# Altium PCB ESP32 with USBCPCB.PcbDoc (part 3 of 3)
Units mil, origin at the board's own origin, x right, y up, seen from the top; angles counter-clockwise.
Board outline 2800 x 1000 mil, 4 copper layers (L1, L2, L3, L4), stack 61.583 mil thick; 64 components, 73 nets, 299 pads, 159 vias.
Unrouted connection lines stored in the file: 2.
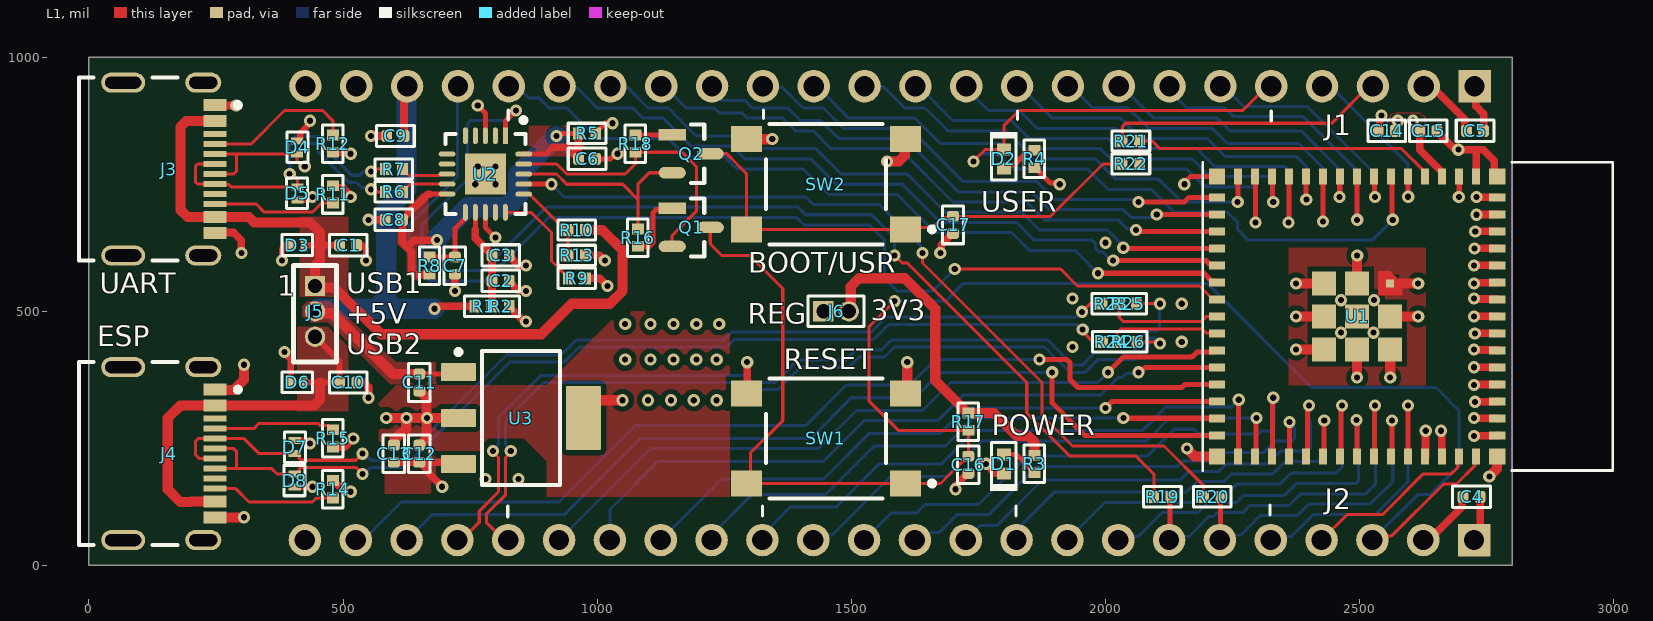
[diagram p0: L1 view]

## Via types
v1: diameter 24, hole 12, L1 to L4, tented both sides, 159 vias

## Nets (pads, with @x,y where several pads share a name; then routed paths per layer and width w, separated by ;. In a path a pad name is that pad's centre, name@x,y a point inside that pad or via, vN(x,y) a via of type N, cw(c..) or ccw(c..) an arc to the next point about the centre after c; other vN are vias at no path point) (continued)
GND: (continued)
  L1 w15: J3.B1A12 248.7,655 285,655 300,640 v1(300,615) ; J3.A1B12 248.54,905 v1(290,905) ; R14.1 481.18,167.01 501.47,146.72 513.28,146.72 v1(515,145) ; R15.1 502.99,232.99 v1(520,250) ; C10.1 541.21,360 550,351.21 v1(550,330) ; v1(550,680) C8.1 ; v1(555,845) C9.1 ; v1(720,540) C7.1 ; C2.1 826.93,558.82 844.03,541.72 858.28,541.72 v1(860,540) ; C3.1 826.93,608.82 845.75,590 v1(860,590) ; R9.1 1005,565 v1(1020,550) ; R13.2 1005,610 v1(1015,600) ; SW1.4 1295,340.08 v1(1295,400) ; v1(1675,615) 1676.72,616.72 1676.72,630.97 1698.82,653.07 C17.1 ; v1(1705,150) 1705,157.32 1728.82,181.14 C16.1 ; v1(1765,200) 1765,198.9 1782.6,181.3 D1.1 ; C14.1 2539.27,858.13 2539.27,878.77 2543.07,882.56 v1(2543.07,885) ; J2.2 2636,50 2701.56,115.56 2701.56,133.48 C4.1 ; U1.42 2629.45,214.96 2629.45,264.45 v1(2630,265) ; C15.1 2655.06,851.87 2655.06,850.69 2686.03,819.72 2692.28,819.72 v1(2694,818) 2727,818 ; v1(2660,265) 2661.18,263.82 2661.18,215.59 U1.43 ; v1(2695,725) v1@2695.83,725.83 ; v1(2725,255) 2725.37,255.37 2770.26,255.37 U1.46 ; v1(2725,290) 2769.84,290 U1.47 ; v1(2725,390) U1.50@2770.24,390 ; v1(2725,425) 2725.96,424.04 2769.67,424.04 U1.51 ; v1(2725,490) U1.53 ; v1(2725,525) 2725.77,524.23 2769.86,524.23 U1.54 ; v1(2725,555) 2725.96,555.96 2769.67,555.96 U1.55 ; J1.1@2725,950 2728,947 2728,904 2743.86,888.14 C5.1 ; v1@2725.39,590.39 U1.56 ; v1(2726.14,623.86) U1.57 ; v1@2726.18,356.18 U1.49@2774.41,356.18 ; v1(2726.54,456.54) U1.52 ; v1(2727.01,322.01) 2769.96,322.01 U1.48 ; v1(2727.32,657.32) U1.58 ; U1.1 2729.29,815.71 2727,818 ; v1(2730,690) 2730.39,690.39 2770.24,690.39 U1.59 ; v1(2730,725) 2730.37,724.63 2770.26,724.63 U1.60 ; U1.65@2770,213.78 U1.65 ; U1.62 2765,771.22 2765,796 2743,818 2727,818
  L1 w20: J4.B1A12 304.09,94.09 v1(305,95) ; J4.A1B12 248.7,345 285,345 305,365 v1(305,395) ; v1(585,290) v1(625,290) ; C13.1 601.18,236.93 601.81,237.56 601.81,248.27 613.53,259.98 615.41,259.98 624.23,268.81 624.23,289.23 v1(625,290) ; C12.1 651.18,236.93 664.23,249.98 664.23,289.23 v1(665,290) ; C11.1 651.18,343.07 664.23,330.02 664.23,290.77 v1(665,290) ; U3.2 v1(665,290) ; U3.4 973.03,300.55 997.48,325 v1(1050,325) ; SW2.4 1343.58,838.58 v1@1345,840 ; v1(1570,795) 1593.28,795 1605,806.72 1605,837.09 SW2.3 ; SW1.3 1610,342.09 v1(1610,400) ; v1(2160,230) 2175.59,214.41 U1.64 ; v1(2375,555) v1(2375,555) U1.71 ; v1@2375.04,425.04 U1.73 ; v1(2375,490.04) U1.72 ; v1(2495,369.96) U1.70 ; U1.69 v1@2495.04,610 ; v1(2559.96,369.96) U1.68 ; U1.67 v1@2615.04,490 ; U1.66 v1@2615.04,554.96 ; v1(2755,175) 2770,190 U1.65@2770,213.78 ; v1(625,290) v1(665,290)
  other v1: 780,170 845,170 1100,325 1145,325 1190,325 1235,325 2725,355 1055,405 1105,405 1150,405 1195,405 1235,405 2375,425.08 1935,430 2150,440 2463,458 2527,458 1055,475 1105,475 1150,475 1195,475 1240,475 2615.08,489.96 2150,515 2463,522 2528,522 1935,525 2615.08,554.92 2725,590 2495.08,610.04 2000,635 760,750 800,750 765,785 800,785 1344.29,839.29 435,875
GPIO0: R21.2 R22.2 U1.4 | length 640.3
  L1 w6: R22.2 R21.2 2091.75,835 2106.75,820 2582.36,820 2628.9,773.46 U1.4
GPIO1: J1.4 U1.5 | length 341.2
  L1 w10: v1(2595.43,725.43) U1.5
  L4 w6: J1.4@2425,950 2435,950 2595.43,789.57 v1(2595.43,725.43)
GPIO2: D2.1 J1.5 U1.6 | length 1689.7
  L1 w6: v1(1740,795) 1763.7,818.7 D2.1 1800,865 1830,895 2270,895 J1.5@2325,950
  L1 w10: U1.6 2563.48,764.07 2563.48,681.52 v1(2565,680)
  L4 w6: v1(1740,795) 1755,810 1786.72,810 1816.72,780 1965,780 2005,740 2090,740 2135,695 2240,695 2260,675 2260,660.86 2280.86,640 2525,640 v1(2565,680)
GPIO3: J1.6 U1.7 | length 465.8
  L1 w10: U1.7 2529.25,764.84 2529.25,725.75 v1(2530,725)
  L4 w6: J1.6@2225,950 2272,903 2397,903 2530,770 v1(2530,725)
GPIO4: J1.7 U1.8 | length 632.8
  L1 w10: v1(2495.04,680.04) U1.8
  L4 w6: J1.7@2125,950 2125,935.39 2147.94,912.44 2147.94,912.06 2160,900 2235,900 2252,883 2388.72,883 2495.04,776.68 v1(2495.04,680.04)
GPIO5: J1.8 U1.9 | length 602.4
  L1 w10: v1(2460,725) 2460.79,725.79 2460.79,764.8 U1.9
  L4 w6: J1.8@2025,950 2095,880 2135,880 2135.86,880.86 2144.14,880.86 2145,880 2220,880 2245,855 2385,855 2460,780 v1(2460,725)
GPIO6: J1.9 U1.10 | length 767
  L1 w10: v1(2428.11,676.97) U1.10
  L4 w6: J1.9@1925,950 1975,900 2033.56,900 2034.42,900.86 2042.71,900.86 2056.06,887.5 2057.5,887.5 2085,860 2210,860 2240,830 2380,830 2428.11,781.89 v1(2428.11,676.97)
GPIO7: J1.10 U1.11 | length 742.4
  L1 w10: v1@2394.25,720.75 U1.11@2394.25,759.84
  L4 w6: J1.10@1825,950 1895,880 2030,880 2070,840 2200,840 2235,805 2375,805 2395,785 v1(2395,720)
GPIO8: J1.11 U1.12 | length 907.1
  L1 w10: v1(2360.04,675.04) 2361.18,676.18 U1.12
  L4 w6: J1.11@1725,950 1725,939.53 1769.53,895 1830,895 1865,860 2020,860 2059.11,820.89 2064.11,820.89 2065,820 2180,820 2215,785 2354.18,785 2360.04,779.14 v1(2360.04,675.04)
GPIO9: J1.12 U1.13 | length 879.7
  L1 w10: U1.13 2328.86,764.45 2328.86,716.14 v1(2330,715)
  L4 w6: J1.12@1625,950 1700,875 1815,875 1850,840 2005,840 2045,800 2170,800 2204.11,765.89 2209.11,765.89 2210,765 2324.14,765 2330,759.14 v1(2330,715)
GPIO10: J1.13 U1.14 | length 1007
  L1 w10: v1(2295.04,675.04) U1.14@2295.04,760.59
  L4 w6: J1.13@1525,950 1533.23,941.77 1563.23,941.77 1605,900 1645,900 1690,855 1805,855 1840,820 1990,820 2030,780 2160,780 2193.23,746.77 2198.23,746.77 2200,745 2289.18,745 2295.04,739.14 v1(2295.04,675.04)
GPIO11: J1.14 U1.15 | length 983.3
  L1 w10: v1(2260,715) 2260.79,715.79 U1.15
  L4 w6: J1.14@1425,950 1495,880 1625,880 1675,830 1795,830 1825,800 1980,800 2020,760 2105,760 2150,715 v1(2260,715)
GPIO12: J1.15 U1.16 | length 995.6
  L1 w10: v1(2065,715) 2155,715 2164.25,724.25 U1.16
  L4 w6: J1.15@1325,950 1335,940 1365,940 1405,900 1445,900 1485,860 1615,860 1720,755 1865,755 1900,720 2052.14,720 2054.46,717.68 2062.32,717.68 v1(2065,715)
GPIO13: J1.16 U1.17 | length 1113.5
  L1 w10: v1(2100.79,690.79) U1.17
  L4 w6: J1.16@1225,950 1225,938.18 1248.18,915 1290,915 1305,900 1375,900 1400,875 1440,875 1475,840 1605,840 1710,735 1855,735 1890,700 2035,700 2050,685 2091.21,685 2097,690.79 v1(2100.79,690.79)
GPIO14: J1.17 U1.18 | length 1215.7
  L1 w10: v1(2060,660) 2062.68,657.32 U1.18
  L4 w6: J1.17@1125,950 1175,900 1230,900 1240,890 1285,890 1295,880 1365,880 1390,855 1425,855 1460,820 1595,820 1700,715 1845,715 1880,680 2025,680 2042.32,662.68 2057.32,662.68 v1(2060,660)
GPIO15: J1.18 U1.19 | length 1331.8
  L1 w10: v1(2035,625) 2036.14,623.86 U1.19
  L4 w6: J1.18@1025,950 1035.33,939.67 1060.33,939.67 1100,900 1140,900 1195,845 1275,845 1300,820 1430,820 1480,770 1610,770 1685,695 1835,695 1870,660 2003.79,660 2015,648.79 2035,628.78 v1(2035,625)
GPIO16: J1.19 U1.20 | length 1449.5
  L1 w10: v1(2015,600) 2197.84,600 2204.58,593.27 2216.57,593.27 U1.20
  L4 w6: J1.19@925,950 935.33,939.67 960.33,939.67 1000,900 1070,900 1090,880 1130,880 1185,825 1265,825 1290,800 1420,800 1470,750 1600,750 1675,675 1825,675 1860,640 1974.14,640 1980,634.14 1980,623.79 1986.97,616.82 1994.39,616.82 2011.21,600 v1(2015,600)
GPIO17: J1.20 U1.21 | length 1557.3
  L1 w10: v1(1985,575) 2193.5,575 2208.7,559.8 2216.57,559.8 U1.21
  L4 w6: J1.20@825,950 835,950 865,920 885,920 905,900 940,900 1000,840 1140,840 1175,805 1250,805 1275,780 1405,780 1455,730 1590,730 1665,655 1815,655 1850,620 1940,620 v1(1985,575)
GPIO18: J1.21 U1.22 | length 2193.9
  L1 w6: v1(1703.33,583.33) 1911.67,583.33 1945,550 2185.04,550 2211.57,523.46 U1.22
  L4 w6: J1.21@725,950 725,765 630,670 630,600 670,560 780,560 905,685 1391.72,685 1406.72,670 1535,670 1565,640 1565,565 1590,540 1660,540 v1(1703.33,583.33)
GPIO21: J2.19 U1.25 | length 1449
  L1 w10: v1(2005,380) 2035,410 2170,410 2180.2,420.2 2216.57,420.2 U1.25
  L4 w6: J2.19 1105,230 1435,230 1510,305 1640,305 1695,360 1985,360 v1(2005,380)
GPIO26: J2.18 U1.26 | length 1370.3
  L1 w10: v1(2065,380) 2068.79,380 2078.39,389.61 U1.26
  L4 w6: J2.18 1025,110 1120,205 1445,205 1525,285 1670,285 1720.13,335.13 1990.13,335.13 2025,370 2033,370 2040.32,377.32 2062.32,377.32 v1(2065,380)
GPIO33: J2.17 U1.28 | length 1207.4
  L1 w10: v1(2000,310) 2000.18,310 2012.86,322.68 U1.28
  L4 w6: J2.17 1245,170 1445,170 1535,260 1675,260 1725,310 v1(2000,310)
GPIO34: J2.16 U1.29 | length 1100
  L1 w10: v1(2035,290) 2035.39,289.61 2219.06,289.61 U1.29
  L4 w6: J2.16 1225,60 1305,140 1450,140 1545,235 1685,235 1740,290 v1(2035,290)
GPIO35: J2.15 U1.31 | length 1164.6
  L1 w10: U1.31@2259.96,219.41 2261.39,220.84 2261.39,325.39 v1(2262,326)
  L4 w6: J2.15 1325,60 1380,115 1470,115 1555,200 1678,200 1743,265 1745,265 1746,266 2073,266 2119,312 2248,312 v1(2262,326)
GPIO36: J2.14 U1.32 | length 1048.1
  L1 w10: U1.32 2295.63,215.78 2295.63,288.63 v1(2297,290)
  L4 w6: J2.14 1434.73,59.73 1461.73,59.73 1577,175 1687,175 1757,245 2081,245 2126,290 v1(2297,290)
GPIO37: J2.13 U1.33 | length 1081.6
  L1 w10: U1.33 2328.86,215.55 2328.86,328.86 v1(2330,330)
  L4 w6: J2.13 1578,103 1628,103 1645,120 1707.6,120 ; 1707,120 1750,120 1845,215 2082,215 2135,268 2174,268 2183,259 2301.2,259 2307.2,265 2325.14,265 2331,270.86 2331,329 v1(2330,330)
GPIO38: J2.12 U1.34 | length 927.8
  L1 w10: U1.34@2360.75,220.16 2361.59,221 2361.59,281.59 v1(2362,282)
  L4 w6: J2.12 1639.61,50 1654.61,65 1673,65 1708,100 1770,100 1865,195 2142,195 2153,206 2214,206 2230,222 2311,222 2334,245 2366.14,245 2372,250.86 2372,269.14 2362,279.14 v1(2362,282)
GPIO39: J2.11 U1.35 | length 935.9
  L1 w10: U1.35@2394.82,219.55 2397.32,222.05 2397.32,312.32 v1(2400,315)
  L4 w6: J2.11 1725.18,50 1754.18,79 1787,79 1876,168 2147,168 2164,185 2223,185 2238,200 2319,200 2344,225 2397.14,225 2403,230.86 2403,283 2400,286 v1(2400,315)
GPIO40: J2.10 U1.36 | length 831.3
  L1 w10: U1.36 2429.56,215.85 2429.56,284.56 v1(2430.28,285.28)
  L4 w6: J2.10 1835.33,60.33 1835.33,80.33 1900,145 2160,145 2180,165 2233,165 2248,180 2329,180 2353.16,204.16 2425.14,204.16 2431,210.02 2431,284.56 v1(2430.28,285.28)
GPIO41: J2.9 U1.37 | length 816
  L1 w10: U1.37@2461.79,221.66 2463.29,223.16 2463.29,313.29 v1(2465,315)
  L4 w6: J2.9 1999,124 2172,124 2192,144 2242,144 2258,160 2343,160 2365,182 2454.1,182 2465,192.9 v1(2465,315)
GPIO42: J2.8 U1.38 | length 708.8
  L1 w10: v1(2494,286) 2494.52,285.48 2494.52,221.39 U1.38@2495.75,220.16
  L4 w6: J2.8 2032.23,57.23 2064.23,57.23 2111,104 2181,104 2201,124 2257,124 2271,138 2352,138 2375,161 2492.14,161 2498,166.86 2498,273.14 2496.68,274.46 2496.68,283.32 v1(2494,286)
GPIO45: J2.5 U1.41 | length 563.1
  L1 w10: v1(2595,315) 2595.22,314.78 U1.41@2595.22,219.67
  L4 w6: J2.5 2331.73,56.73 2364.73,56.73 2408,100 2530,100 2595,165 v1(2595,315)
GPIO46: J2.4 U1.44 | length 349.8
  L1 w6: J2.4 2475,100 2545,100 2625.28,180.28 2680.28,180.28 2692.95,192.95 2692.95,211.54 U1.44
GPIO47: J2.23 U1.27 | length 1886.3
  L1 w10: v1(1870,405) 1924.14,405 1930,399.14 1930,365.86 1945.86,350 2150,350 2156.14,356.14 U1.27
  L4 w6: J2.23 539.61,50 555.35,65.73 555.73,65.73 615,125 925,125 1075,275 1410,275 1490,355 1615,355 1665,405 v1(1870,405)
GPIO48: J2.22 U1.30 | length 1817.8
  L1 w10: v1(1895,380) 1895,320 1959.25,255.75 2125.75,255.75 U1.30
  L4 w6: J2.22 665,90 674.84,99.84 709.84,99.84 710,100 935,100 1085,250 1420,250 1500,330 1625,330 1675,380 v1(1895,380)
NetD1_2: D1.2 R3.1 | length 75.5
  L1 w10: D1.2 1824.29,218.7 1853.19,189.8 1853.19,188.62 1858.82,182.99 R3.1
NetD2_2: D2.2 R4.1 | length 74.8
  L1 w10: D2.2 1806.72,788.02 1820.09,788.02 1843.45,811.38 1854.37,811.38 R4.1
NetJ3_A5: J3.A5 R12.2 | length 295.9
  L1 w6: J3.A5 300,829.13 319.13,829.13 385,895 460,895 480,875 R12.2
NetJ3_B5: J3.B5 R11.2 | length 246.5
  L1 w6: J3.B5 328.98,711.02 345,695 440,695 457.99,712.99 R11.2
NetJ4_A5: J4.A5 R15.2 | length 241.9
  L1 w6: J4.A5 324.29,269.29 334.67,279.67 450.33,279.67 455,275 472.01,275 R15.2
NetJ4_B5: J4.B5 R14.2 | length 246.5
  L1 w6: J4.B5 288.82,151.18 315,125 440,125 447.99,132.99 R14.2
NetQ1_1: Q1.1 R16.1 | length 133
  L1 w10: R16.1 1102.99,627.99 1110,635 1110,694.14 1115.86,700 1145.18,700 Q1.1
NetQ2_1: Q2.1 R18.2 | length 72.7
  L1 w10: R18.2 1075.2,847.2 1147.38,847.2 Q2.1
NetR9_2: R9.2 U2.15 | length 210.7
  L1 w6: U2.15 870.41,694.59 910,655 910,599.17 942.99,566.18 R9.2
RTS_FTDI: Q1.2 R18.1 U2.19 | length 567.3
  L1 w6: U2.19 920.32,789.68 940,770 1055,770 1075,790 R18.1 1167.01,812.99 1195,785 1195,696.78 1147.58,649.36 Q1.2@1147.58,627.96
RXD_FTDI: R19.2 U2.1 | length 2285.5
  L1 w6: v1(1585,610) 1600,595 1610,595 1845,360 1845,300 1930,215 2060,215 2095,180 R19.2
  L1 w10: U2.1 819.37,874.37 v1(840,895)
  L4 w6: v1(840,895) 820,875 750.86,875 745,869.14 745,760 655,670 655,605 680,580 775,580 900,705 1395,705 1410,690 1540,690 1585,645 v1(1585,610)
TXD_FTDI: R20.2 U2.17 | length 1661
  L1 w6: v1(1640,615) 1640,595 1875,360 1875,295 1935,235 2115,235 2192.99,157.01 R20.2
  L1 w10: U2.17 855.57,750.16 909.84,750.16 v1(910,750)
  L4 w6: v1(910,750) 935,725 1410,725 1425,710 1555,710 1637.32,627.68 1637.32,617.68 v1(1640,615)
U0RXD: J2.6 R20.1 U1.40 | length 660
  L1 w10: J2.6 2226,51 2226,134 R20.1 ; U1.40@2561.48,220.89 2563.48,222.89 v1(2563.48,285.48)
  L4 w6: J2.6 2235,60 2266,60 2304,98 2377,98 2400,121 2521,121 2565,165 2565,283.97 v1(2563.48,285.48)
U0TXD: J2.7 R19.1 U1.39 | length 789.5
  L1 w10: J2.7 2127.01,52.01 2127.01,132.99 R19.1 ; U1.39@2529.75,219.62 2529.25,220.12 2529.25,314.25 v1(2530,315)
  L4 w6: J2.7 2132.23,57.23 2164.23,57.23 2203.34,96.34 2212.34,96.34 2220,104 2270,104 2284,118 2361,118 2384,141 2512,141 2531,160 2531,314 v1(2530,315)
VBUS_SENSE: R10.2 R13.1 U2.16 | length 167.5
  L1 w6: U2.16 866.72,730.63 930.54,666.81 937.36,666.81 942.99,661.18 R10.2 R13.1
pads on no net: J1.24 J3.A8 J3.B8 J4.A8 J4.B8 U2.2 U2.4 U2.5 U2.6 U2.7 U2.14

## Polygon pours and split planes (outlines as drawn)
+3V3_FTDI on L1 "+3V3_FTDI_L01_P003" (solid, remove dead copper, pour order 3): 683,561 639,561 625,575 625,615 607,633 607,670 605,672 605,692 615,692 656,733 668,721 668,659 674,653 691,653 700,644 700,632 696,632 690,626 689,627 645,627 645,586 646,585 681,585 683,583 683,562
+3.3V on L1 "+3.3V_L01_P000" (solid, remove dead copper, pour order 0): 2554.5,834 2625.5,834 2629.5,838 2628.5,839 2628.5,881 2619.5,890 2570.5,890 2561.5,887 2559.5,881 2554.5,873
+5V_VBUS1 on L1 "+5V_VBUS1_L01_P007" (solid, remove dead copper, pour order 7): 416,529 510,529 510,686 415,686 415,530
+5V_VBUS2 on L1 "+5V_VBUS2_L01_P008" (solid, remove dead copper, pour order 8): 408,469 409,470 470,470 510,430 510,303 410,303 410,470
GND on L1 "GND_L01_P011" (solid, remove dead copper, pour order 11): 1260.32,138 1260.32,165.54 1260.32,500.54 1045.32,500.54 899.78,355 604.78,355 570.32,320.54 570.32,240.54 585.32,225.54 770.32,225.54 770.32,235.54 785.32,250.54 855.32,250.54 900.32,205.54 900.32,135.54 1250.32,135.54 1260.32,135.54
+3.3V_REG on L1 "+3.3V_REG_L01_P005" (solid, remove dead copper, pour order 5): 764,220 764,141 582,141 582,218 581,219 582,220 763,220
+5V on L1 "+5V_L01_P006" (solid, pour order 6): 764,401 763,400 605,400 475,520 430,520 420,510 420,490 436.5,479 471,479 593,357 765,357 765,400
GND on L1 "GND_L01_P009" (solid, pour order 9): 2360,625 2630,625 2630,355 2360,355
+3V3_FTDI on L1 "+3V3_FTDI_L01_P002" (solid, pour order 2): 975,865 975,785 950,785 950,795 940,805 865,805 865,865
GND on L2 "GND_L02_P018" (solid, remove dead copper, pour order 18): 2787,12 2787,985 7,985 7,12
+3.3V on L2 "+3.3V_L02_P017" (solid, pour order 17): 2764,16 2767,19 2767,982 1007,982 983,958 983,853 986,853 999,840 1105,840 1276,669 1474,669 1474,493 1488,479 1506,479 1517,497 1517,636 1546,665 1931,665 1979,713 2039,713 2039,733 2080,774 2082,772 2579,772 2664,669 2663,668 2663,302 2633,302 2607,276 2607,180 2490,180 2390,80 2390,17 2762,17 2764,19 2766,19
+3.3V_REG on L2 "+3.3V_REG_L02_P013" (solid, pour order 13): 567.5,221.02 559,203.97 559,130.02 765,130.02 765,221.02
GND on L3 (split plane): 2779.9,20.1 20.1,20.1 20.1,979.9 2779.9,979.9

## Silkscreen, mask and mechanical layers (free items; w line width, h text height)
Top Overlay:
  lines w6: 824,95 824,117 ; 825,876 825,896 ; 1325,97 1325,117 ; 1327,879 1327,896 ; 1824,97 1824,117 ; 1827,877 1827,894 ; 2324,99 2324,119 ; 2326,874 2326,894
  text "J1" at 2431,846 h40
  text "USER" at 1756,696 h40
  text "BOOT/USR" at 1296.72,576 h40
  text "UART" at 21,536 h40
  text "USB1" at 506,536 h40
  text "3V3" at 1538,482 h40
  text "+5V" at 506,476 h40
  text "REG" at 1296,476 h40
  text "ESP" at 16,431 h40
  text "USB2" at 506,416 h40
  text "RESET" at 1366.7,386 h40
  text "POWER" at 1776,256 h40
  text "J2" at 2431,111 h40
Bottom Overlay:
  text "GND" at 549,869 h40 r90
  text "5V" at 644,869 h40 r90
  text "I018" at 744,869 h40 r90
  text "I017" at 844,869 h40 r90
  text "I016" at 944,869 h40 r90
  text "I015" at 1044,869 h40 r90
  text "I014" at 1144,869 h40 r90
  text "I013" at 1244,869 h40 r90
  text "I012" at 1344,869 h40 r90
  text "I011" at 1449,869 h40 r90
  text "I010" at 1544,869 h40 r90
  text "I09" at 1644,869 h40 r90
  text "I08" at 1749,869 h40 r90
  text "I07" at 1844,869 h40 r90
  text "I06" at 1944,869 h40 r90
  text "I05" at 2044,869 h40 r90
  text "IO4" at 2149,869 h40 r90
  text "IO3" at 2249,869 h40 r90
  text "IO2" at 2349,869 h40 r90
  text "I01" at 2449,869 h40 r90
  text "I00" at 2549,869 h40 r90
  text "3V3" at 2649,869 h40 r90
  text "GND" at 2749,869 h40 r90
  text "NC" at 449,859 h40 r90
  text "<---PIN1--->" at 2749,739 h40 r90
  text "GND" at 444,279 h40 r90
  text "I047" at 544,279 h40 r90
  text "I048" at 644,279 h40 r90
  text "USB-" at 744,279 h40 r90
  text "USB+" at 844,279 h40 r90
  text "I021" at 944,279 h40 r90
  text "I026" at 1044,279 h40 r90
  text "I033" at 1144,279 h40 r90
  text "I034" at 1244,279 h40 r90
  text "I035" at 1344,279 h40 r90
  text "I036" at 1444,279 h40 r90
  text "I037" at 1544,279 h40 r90
  text "I038" at 1644,279 h40 r90
  text "I039" at 1744,279 h40 r90
  text "I040" at 1844,279 h40 r90
  text "I041" at 1944,279 h40 r90
  text "I042" at 2044,279 h40 r90
  text "TXD" at 2144,279 h40 r90
  text "RXD" at 2244,279 h40 r90
  text "I045" at 2344,279 h40 r90
  text "I046" at 2444,279 h40 r90
  text "EN" at 2544,279 h40 r90
  text "GND" at 2644,279 h40 r90
  text "3V3" at 2744,279 h40 r90
Board Shape:
  the board outline again, w20

## Text inside footprints (layer, text, board x,y; h text height)
J1: Bottom Overlay "1" at 2707,1009 h40 r270
J2: Bottom Overlay "1" at 2701,-29 h40 r270
J5: Top Overlay "1" at 371,531 h40